# Altium PCB PCBA.PcbDoc
Units mil, origin at the board's own origin, x right, y up, seen from the top; angles counter-clockwise.
Board outline 2540 x 685 mil, 2 copper layers (Top Layer, Bottom Layer), stack 61.811 mil thick; 44 components, 30 nets, 131 pads, 33 vias.
Unrouted connection lines stored in the file: 2.
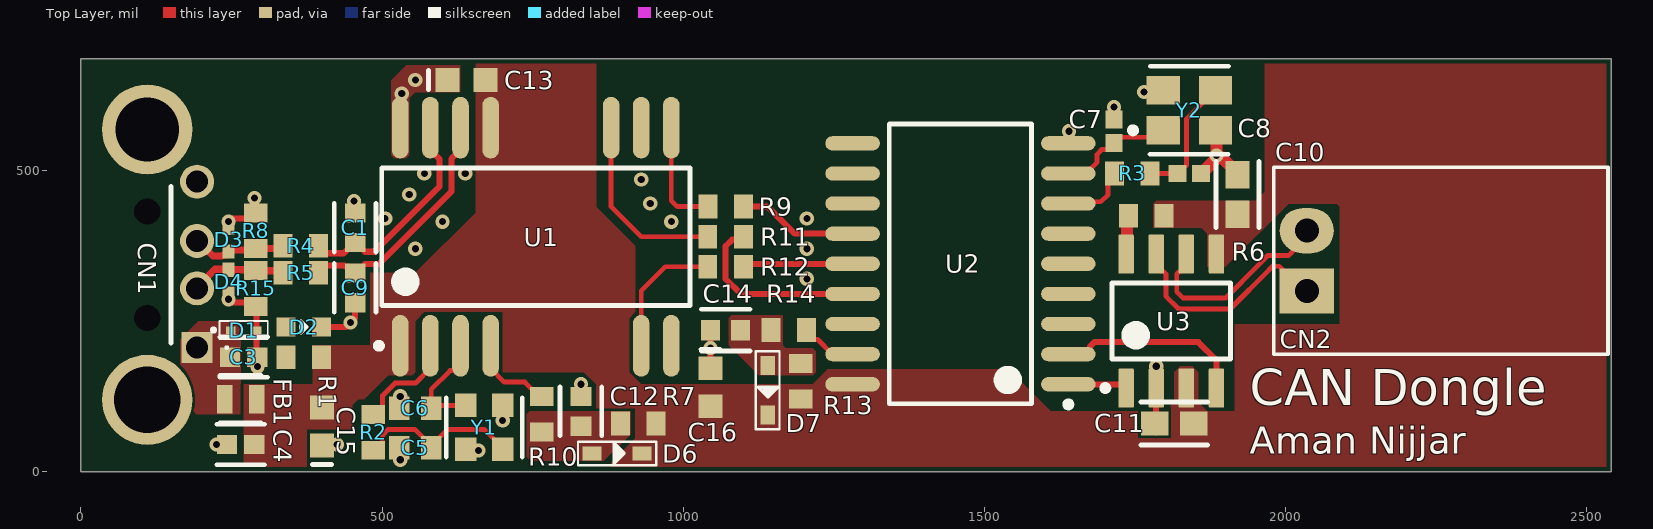
[diagram p0: Top Layer view]
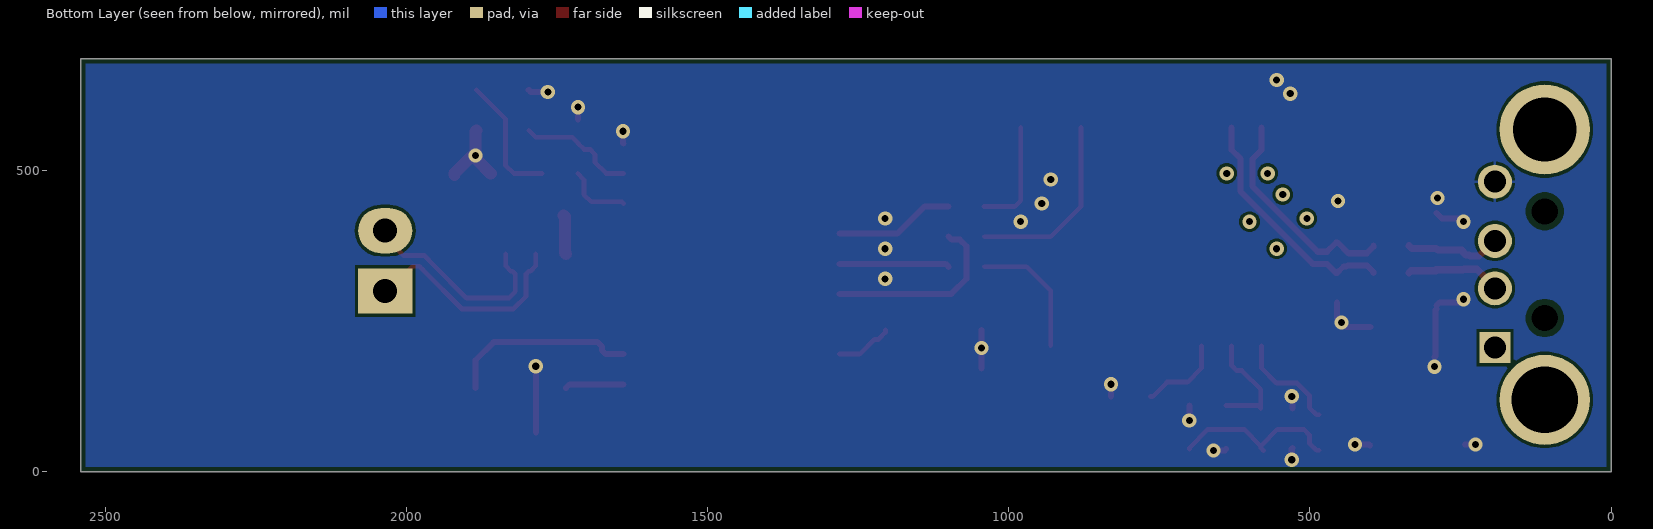
[diagram p1: Bottom Layer view, seen from below]
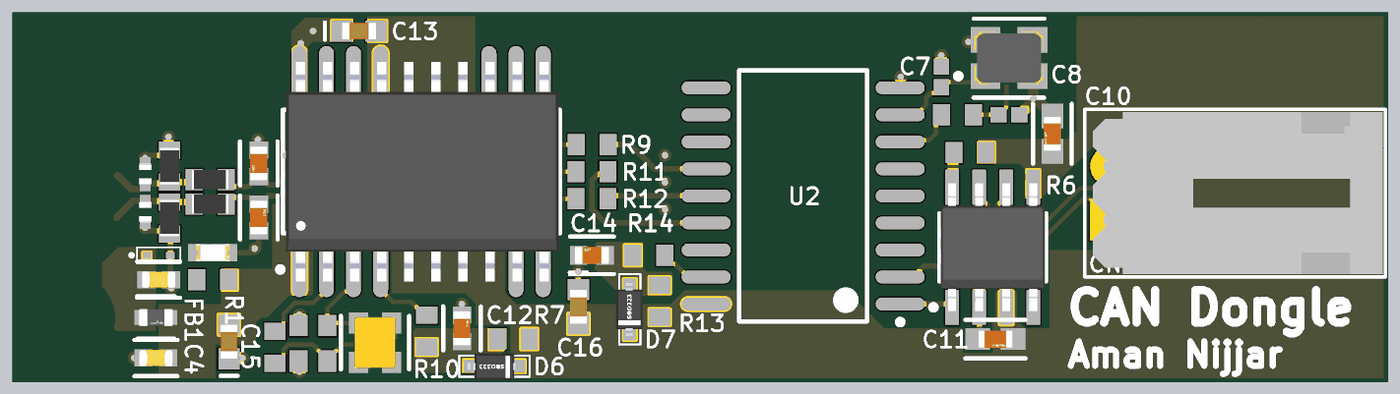
[diagram p2: 3D render of the assembled board from above, using the file's embedded part models]

## Layer stack, top to bottom
Top Solder: solder mask 0.5, Solder Resist, Dk 3.8
Top Layer: signal copper 1.378
Dielectric: core 59.055, FR-4, Dk 4.5
Bottom Layer: signal copper 1.378
Bottom Solder: solder mask 0.5, Solder Resist, Dk 3.8

## Board outline
0,0 2540,0 2540,685 0,685

## Design rules (kind name [scope] priority, off if disabled: settings)
BoardOutlineClearance [All] p1: gap=7.87 ignorepadtopadclearanceinfootprint=FALSE
Clearance [All] p1: gap=5 ignorepadtopadclearanceinfootprint=FALSE except(9.84: Arc-Hole Track-Hole SMDPad-Hole THPad-Hole Via-Hole Fill-Hole Poly-Hole Region-Hole Text-Hole)
ComponentClearance [All] p1: gap=5 collisioncheckmode=3 verticalgap=5 showdistances=TRUE
DiffPairsRouting [All] p1: maxlimit=10 minlimit=5 mostfreqgap=5 toplayer_minwidth=5 toplayer_maxwidth=1000 toplayer_prefwidth=12 bottomlayer_minwidth=5 bottomlayer_maxwidth=1000 bottomlayer_prefwidth=5 maxuncoupledlength=500
Height [All] p1: minheight=0 maxheight=71497.94 prefheight=500
HoleSize [All] p1: absolutevalues=TRUE maxlimit=248.03 minlimit=11.81 maxpercent=80.000 minpercent=20.000
HoleToHoleClearance [All] p1: gap=9.84 allowstackedmicrovias=FALSE
MinimumAnnularRing [All] p1: minimumring=3
MinimumSolderMaskSliver [All] p1: minsoldermaskwidth=0
PlaneClearance [All] p1: clearance=5
PlaneConnect PlaneConnectPowerPads [InPadClass('PowerPads')] p1: planeconnectstyle=Direct reliefexpansion=20 reliefentries=4 reliefconductorwidth=10 reliefairgap=10
PlaneConnect [All] p2: pad.planeconnectstyle=Relief pad.reliefexpansion=11.81 pad.reliefentries=4 pad.reliefconductorwidth=5 pad.reliefairgap=5 via.planeconnectstyle=Direct via.reliefexpansion=11.81 via.reliefentries=4 via.reliefconductorwidth=5 via.reliefairgap=5
PolygonConnect PolygonConnectPowerPads [All vs (InPadClass('PowerPads'))] p1: connectstyle=Direct reliefconductorwidth=10 reliefentries=4 polygonreliefangle="90 Angle" airgapwidth=10
PolygonConnect [All] p2: thpad.connectstyle=Relief thpad.reliefconductorwidth=5 thpad.reliefentries=4 thpad.polygonreliefangle="90 Angle" thpad.airgapwidth=5 smdpad.connectstyle=Relief smdpad.reliefconductorwidth=5 smdpad.reliefentries=4 smdpad.polygonreliefangle="90 Angle" smdpad.airgapwidth=5 via.connectstyle=Direct via.reliefconductorwidth=5 via.reliefentries=4 via.polygonreliefangle="90 Angle" via.airgapwidth=5
RoutingVias [All] p1: holewidth=11.81 width=23.62 viastyle="Through Hole" minholewidth=11.81 minwidth=23.62 maxholewidth=23.62 maxwidth=259.84
SilkToSilkClearance [All] p1: silktosilkclearance=0
SilkToSolderMaskClearance [IsPad] p1: minsilkscreentomaskgap=5 clearancetoexposedcopper=TRUE
SolderMaskExpansion [All] p1: expansion=2.95 istentingtop=FALSE
Width [All] p1: maxlimit=1000 minlimit=5 preferedwidth=5 minimp=50.000000 maximp=50.000000 favimp=50.000000
20 further rules are at their usual default settings.

## Classes and differential pairs
differential pair U3_CAN: +U3_CAN_P -U3_CAN_N
differential pair U1_USB: +U1_USB_P -U1_USB_N
differential pair USB: +USB_P -USB_N

## Components (designator, comment, footprint, x,y, rotation, side; value= is the part's Value field where it differs from the comment)
C1 "06031A470JAT2A" FP-0603-L_1_6_0_15-W_0_81-IPC_C 455,405 r270 top locked value=47pF
C3 "AC0603KRX7R9BB103" FP-AC0603-IPC_C 270,190 r0 top locked
C4 "AC0603KRX7R9BB103" FP-AC0603-IPC_C 265,45 r180 top locked
C5 "18pF" CAPC1608X92X38NL15T08 555,39.41 r0 top locked
C6 "18pF" CAPC1608X92X38NL15T08 555,105 r0 top locked
C7 "GRM1555C1H120GA01D" CAPC1005X55X25ML05T10 1715,565 r270 top locked
C8 "GRM1555C1H120GA01D" CAPC1005X55X25ML05T10 1840,495 r180 top locked
C9 "06031A470JAT2A" FP-0603-L_1_6_0_15-W_0_81-IPC_C 455,305 r90 top locked value=47pF
C10 "CL10B104JB8NNNC" FP-CL10-0_1-IPC_A 1920,460 r270 top locked
C11 "CL10B104JB8NNNC" FP-CL10-0_1-IPC_A 1815,80 r0 top locked
C12 "06031A470JAT2A" FP-0603-L_1_6_0_15-W_0_81-IPC_C 830,100 r90 top locked value=47pF
C13 "Placeholder_Capacitor_0603" "CAPC1608N(0603\")" 640,650 r0 top locked value=0F
C14 "06031A470JAT2A" FP-0603-L_1_6_0_15-W_0_81-IPC_C 1070,235 r180 top locked value=47pF
C15 "Placeholder_Capacitor_0603" "CAPC1608N(0603\")" 400,75 r90 top locked value=0F
C16 "Placeholder_Capacitor_0603" "CAPC1608N(0603\")" 1045,140 r270 top locked value=0F
CN1 "USB-A, Plug, TH" "USB-A, Plug, TH-Footprint-1" -227.32,340.79 r270 top locked
CN2 "1x2 Shrouded Right Angle" "2X1 Female Header" 2035,300 r180 top locked
D1 "D5V0F1U2S9-7" D5V0F1U2S9-7-Footprint-1 270,235 r0 top locked value=5E-13F
D2 "LT Q39G-Q1OO-25-1" FP-LB_Q39E-MFG 370,240 r180 top locked
D3 "ESD321DPYR" FP-DPY0002A-MFG 245,385 r90 top locked
D4 "ESD321DPYR" FP-DPY0002A-MFG 245,315.32 r270 top locked
D6 "CUS08F30,H3F" SC-76 890,30 r0 top locked
D7 "CUS08F30,H3F" SC-76 1140,135 r270 top locked
FB1 "BLM18PG330SN1D" FP-BLM18-0_15-t0_8-d1_2-MFG 265,120 r0 top locked
R1 "RC0603FR-0710KL" RESC1608X55X25ML10T15 370,190 r180 top locked
R2 "RC0603JR-070RL" RESC1608X55X25ML10T15 485,65 r90 top locked value=0mΩ
R3 "RC0603JR-070RL" RESC1608X55X25ML10T15 1745,495 r180 top locked value=0mΩ
R4 "RC0603FR-0733RL" RESC1608X55X25ML10T15 365,375 r0 top locked
R5 "RC0603FR-0733RL" RESC1608X55X25ML10T15 365,330 r0 top locked
R6 "RC0603FR-0710KL" RESC1608X55X25ML10T15 1768.12,425.01 r180 top locked
R7 "RC0603FR-0710KL" RESC1608X55X25ML10T15 925,80 r0 top locked
R8 "RC0603FR-0733RL" RESC1608X55X25ML10T15 290,400 r270 top locked
R9 "0Ω" RESC1608X55X25ML10T15 1070.47,440 r180 top locked
R10 "RC0603FR-0710KL" RESC1608X55X25ML10T15 765,95 r90 top locked
R11 "0Ω" RESC1608X55X25ML10T15 1070,390 r180 top locked
R12 "0Ω" RESC1608X55X25ML10T15 1070,340 r180 top locked
R13 "RC0603FR-0710KL" RESC1608X55X25ML10T15 1195,150 r270 top locked
R14 "RC0603FR-0710KL" RESC1608X55X25ML10T15 1175,235 r0 top locked
R15 "RC0603FR-0733RL" RESC1608X55X25ML10T15 290,304 r90 top locked
U1 "MCP2210T-I/SO" SOIC-SO20_M 755,390 r90 top locked
U2 "MCP2515T-I/SO" SOIC-SO18_N 1460,345 r180 top locked
U3 "CAN Transceiver" 8-SOIC 1810,250 r90 top locked
Y1 "12MHz" FP-8Z-MFG 669.49,73.58 r90 top locked
Y2 "16MHz" FP-AM-MFG 1840,600 r0 top locked

## Footprints (in the part's own frame and the unit in brackets; to place one, negate y for a bottom-side part, rotate by r counter-clockwise, add the part's x,y. Pads: shape width x height; smd on the part's side, far side on the other; paste and mask are expansions set on the pad)
"2X1 Female Header" [mil]
  rect 90x75 hole 40: 1(0,0)
  oval 90x75 hole 40: 2(0,-100)
  silkscreen extent -500,-205 55,105, body extent -495,-200 40,100, height 273
8-SOIC [mm] "SOIC, 8-Leads, Body 5x4mm, Pitch 1.27mm, IPC Low Density"
  rrect15% 1.65x0.65 smd: 1(-2.825,1.905) 2(-2.825,0.635) 3(-2.825,-0.635) 4(-2.825,-1.905) 5(2.825,-1.905) 6(2.825,-0.635) 7(2.825,0.635) 8(2.825,1.905)
  silkscreen extent -2.95,-2.5 1.6,2.9, body extent -3,-2.45 3,2.45, height 1.63
CAPC1005X55X25ML05T10 [mm] "Chip Capacitor, 2-Leads, Body 1.00x0.50mm, IPC Low Density"
  rect 0.76x0.72 smd: 1(-0.49,0) 2(0.49,0)
  body extent -0.53,-0.28 0.53,0.27, height 0.55
"CAPC1608N(0603\")" [mm] "Chip Capacitor, Body 1.6x0.8mm (0603\"), IPC Medium Density"
  rect 1x1 smd: 1(-0.8,0) 2(0.8,0)
  silkscreen extent -1.6,-0.4 -1.6,0.4, body extent -0.8,-0.4 0.8,0.4, height 0.9
CAPC1608X92X38NL15T08 [mm] "Chip Capacitor, 2-Leads, Body 1.60x0.80mm, IPC Medium Density"
  rect 0.85x1 smd: 1(-0.675,0) 2(0.675,0)
  body extent -0.88,-0.48 0.88,0.47, height 0.92
D5V0F1U2S9-7-Footprint-1 [mm]
  rect 0.4x0.32 smd: 1(-0.55,0) 2(0.55,0)
  silkscreen extent -1.3,-0.38 1.02,0.38
FP-8Z-MFG [mm]
  rect 1x0.9 smd paste+0 mask+0: 1(-0.925,-0.775) 2(0.925,-0.775) 3(0.925,0.775) 4(-0.925,0.775)
  silkscreen extent -1.25,-1.6 1.25,1.6, body extent -1.53,-1.33 1.52,1.33, height 0.25
FP-0603-L_1_6_0_15-W_0_81-IPC_C [mil]
  rect 31.75x34.18 smd paste+0 mask+0: 1(-24.64,0) 2(24.64,0)
  silkscreen extent -41,-35 41,35, body extent -44,-23 44,23, height 10
FP-AC0603-IPC_C [mil]
  rect 33.79x31.97 smd paste+0 mask+0: 1(-22.72,0) 2(22.72,0)
  silkscreen extent -40,-33 40,33, body extent -31,-16 31,16, height 35
FP-AM-MFG [mm]
  rect 1.4x1.2 smd paste+0 mask+0: 1(-1.1,-0.85) 2(1.1,-0.85) 3(1.1,0.85) 4(-1.1,0.85)
  silkscreen extent -2.5,-1.86 1.65,1.85, body extent -1.9,-1.55 1.9,1.55, height 0.25
FP-BLM18-0_15-t0_8-d1_2-MFG [mm]
  rect 0.65x1.2 smd paste-1000 mask-1000: 1(-0.675,0) 2(0.675,0)
  silkscreen extent -0.87,-1 0.87,1, body extent -1.1,-0.7 1.1,0.7, height 0.25
FP-CL10-0_1-IPC_A [mil]
  rect 45.6x39.85 smd paste+0 mask+0: 1(-32.56,0) 2(32.56,0)
  silkscreen extent -55,-36 55,36, body extent -75,-40 75,40, height 10
FP-DPY0002A-MFG [mm]
  rect 0.6x0.5 smd paste+0 mask+0: 1(-0.5,0) 2(0.5,0)
  body extent -0.9,-0.45 0.9,0.45, height 0.25
FP-LB_Q39E-MFG [mm]
  rect 0.8x0.8 smd paste+0 mask+0: 1(-0.75,0) 2(0.75,0)
  silkscreen extent -0.13,-0.25 0.13,0.25, body extent -0.8,-0.4 0.8,0.4, height 0.4
RESC1608X55X25ML10T15 [mm] "Chip Resistor, 2-Leads, Body 1.60x0.80mm, IPC Low Density"
  rect 0.8x1 smd: 1(-0.75,0) 2(0.75,0)
  body extent -0.85,-0.45 0.85,0.45, height 0.55
SC-76 [mm]
  rect 0.8x0.6 smd: A(-1.05,0) K(1.05,0)
  silkscreen extent -1.65,-0.5 1.65,0.5, body extent -1.25,-0.65 1.25,0.6, height 0.9
SOIC-SO18_N [mm] "SOIC, 18-Leads, Body 11.6x7.5mm, Pitch 1.27mm, IPC Medium Density"
  oval 2.3x0.6 smd: 1(-4.55,5.08) 2(-4.55,3.81) 3(-4.55,2.54) 4(-4.55,1.27) 5(-4.55,0) 6(-4.55,-1.27) 7(-4.55,-2.54) 8(-4.55,-3.81) 9(-4.55,-5.08) 10(4.55,-5.08) 11(4.55,-3.81) 12(4.55,-2.54) 13(4.55,-1.27) 14(4.55,0) 15(4.55,1.27) 16(4.55,2.54) 17(4.55,3.81) 18(4.55,5.08)
  silkscreen extent -4.67,-5.9 3,6.05, body extent -3.8,-5.87 3.8,5.87, height 2.65
SOIC-SO20_M [mm] "SOIC, 20-Leads, Body 12.8x7.5mm, Pitch 1.27mm, IPC Low Density"
  oval 2.6x0.7 smd: 1(-4.6,5.715) 2(-4.6,4.445) 3(-4.6,3.175) 4(-4.6,1.905) 9(-4.6,-4.445) 10(-4.6,-5.715) 11(4.6,-5.715) 12(4.6,-4.445) 13(4.6,-3.175) 17(4.6,1.905) 18(4.6,3.175) 19(4.6,4.445) 20(4.6,5.715)
  silkscreen extent -4.72,-6.5 2.9,6.74, body extent -5.16,-6.45 5.16,6.35, height 2.65
"USB-A, Plug, TH-Footprint-1" [mm]
  rect 1.3x1.3 hole 0.92: 1(3.429,10.668)
  round 1.431 hole 0.92: 2(0.929,10.668) 3(-1.071,10.668) 4(-3.571,10.668)
  round 3.8 hole 2.79: MH1(5.629,8.568)
  round 3.8 hole 2.69: MH2(-5.771,8.568)
  round 0.55 hole 1.1 unplated: MH3(2.179,8.568) MH4(-2.321,8.568)
  silkscreen extent -3.37,9.57 3.48,11.97, body extent -6.35,-9.15 6.35,10.88, height 4.28

## Part data
C1 C9 C12 C14: library part CMP-00198-1, "47pF ± 5%, 100V, 0603 C0G/NP0", Case Code (Imperial)=0603, Case Code (Metric)=1608, Dielectric=C0G, Dielectric Material=Ceramic, Max Operating Temperature=125°C, Min Operating Temperature=-55°C, Package Quantity=1, Temperature Coefficient=30ppm/°C, Tolerance=5%, Voltage=100V, Case/Package=0603, Construction=Flat, Depth=0.81mm, Height=0.86mm, Lead Free="Lead Free", Length=1.6mm, Mounting Technology="Surface Mount", Packaging="Tape and Reel", Pins=2, Radiation Hardening=No, Reach SVHC Compliant=No, RoHS Compliant=Yes, Series=-, Termination=SMD/SMT, Thickness=0.035inch, Voltage Rating=100V, Width=0.032inch
C3: library part CMP-00152-2, "AC Series 0603 10 nF 50 V 10% X7R Multilayer Ceramic Capacitor", Capacitance=10nF, Case Code (Imperial)=0603, Case Code (Metric)=1608, Max Operating Temperature=125°C, Min Operating Temperature=-55°C, Ratings=AEC-Q200, Tolerance=10%, Voltage Rating=50V, Case/Package=0603, Lead Free="Lead Free", Mount="Surface Mount", Packaging="Cut Tape", RoHS Compliant=Yes
C4: library part CMP-00152-2, "AC Series 0603 10 nF 50 V 10% X7R Multilayer Ceramic Capacitor", Capacitance=100nF, Case Code (Imperial)=0603, Case Code (Metric)=1608, Max Operating Temperature=125°C, Min Operating Temperature=-55°C, Ratings=AEC-Q200, Tolerance=10%, Voltage Rating=50V, Case/Package=0603, Lead Free="Lead Free", Mount="Surface Mount", Packaging="Cut Tape", RoHS Compliant=Yes
C5 C6: library part CMP-2006-01495-1, Manufacturer=Vitramon, Part Number=VJ0603D180JXPAJ
C7 C8: library part CMP-00106-1, "MURATA - GRM1555C1H120GA01D - SMD flerskiktig keramisk kondensator, 12 pF, 50 V, 0402 [1005 Metrisk], ± 2%, C0G / NP0, GRM Series", Capacitance=12pF, Case Code (Imperial)=0402, Case Code (Metric)=1005, Dielectric=C0G, Max Operating Temperature=125°C, Min Operating Temperature=-55°C, Package Quantity=10000, Tolerance=2%, Voltage=50V, Case/Package=0402, Depth=0.5mm, Height=0.5mm, Lead Free="Lead Free", Length=1mm, Material=Ceramic, Mount="Surface Mount", Packaging="Tape and Reel", Radiation Hardening=No, REACH SVHC="No SVHC", Termination=SMD/SMT, Thickness=0.022inch, Voltage Rating=50V, Voltage Rating (DC)=50V, Width=0.5mm
C10 C11: library part CMP-00000-4, "CAP CER 0.1UF 50V X7R 0603", Capacitance=100nF, Case Code (Imperial)=0603, Case Code (Metric)=1608, Dielectric=X7R, Max Operating Temperature=125°C, Min Operating Temperature=-55°C, Package Quantity=1, Tolerance=5%, Voltage=50V, Case/Package=0603, Contact Plating=Tin, Depth=0.8mm, Height=0.8mm, Length=1.6mm, Material=Ceramic, Mount="Surface Mount", Packaging="Tape and Reel", Radiation Hardening=No, Thickness=0.035inch, Voltage Rating=50V, Width=0.031inch
C13 C15 C16: library part CMP-006-0054-1, "Placeholder 0603 SMT Footprint", Component Type="Standard (No BOM)", Date Created=2016-06-26, Design Item ID=Placeholder_Capacitor_0603, Made By="Ashwin Sira", PackageDescription="Chip Capacitor", Pin Count=2, Publisher=AUVic, Source=AUVic_Schematic_Library_Capacitors.SchLib
CN1: library part CMP-00208-4, Color=Black, Current Rating=1.5A, Flammability Rating="UL94 V-0", Insulation Resistance=1GR, Max Operating Temperature=85°C, Max Voltage Rating (AC)=150V, Min Operating Temperature=-20°C, Package Quantity=1000, Connector Type=USB, Contact Material=Brass, Contact Plating=Gold, Depth=18.8mm, Gender=Male, Halogen Free="Low Halogen", Housing Color=Black, Housing Material=Thermoplastic, Lead Free="Lead Free", Length=12.7mm, Mounting Technology="Through Hole", Number of Circuits=4, Number of Contacts=4, Number of Ports=1, Number of Positions=4, Orientation="Right Angle", Packaging=Tray, Reach SVHC Compliant=Unknown, Series=48037, Termination="Through Hole", Voltage Rating=150V, Voltage Rating (AC)=150V, Weight=0.08113oz
CN2: library part CMP-00010-3, "02 MTE HDR SRRA LATCH", Color=Black, Contact Current Rating=3A, Contact Resistance=15mR, Flammability Rating="UL94 V-0", Insulation Resistance=5GR, Max Operating Temperature=105°C, Min Operating Temperature=-65°C, Package Quantity=68, Approvals=CSA, Backwall/Post Interruptions="No (Without)", Connector Type=Plug,Header,Pin, Contact Gender=Male, Contact Material=Brass, Contact Mating Length=0.23inch, Contact Plating=Gold,Tin,Matte, Contact Retention="Yes (With)", Contact Shape=Square, Current Rating=3A, Depth=13.59mm, ELV=Compliant, Gender=Male, Height=13.59mm, Housing Color=Black, Housing Material=Thermoplastic, Lead Free="Lead Free", Length=7.62mm, Mating Alignment="Yes (With)", Mating Retention="Yes (With)", Mount="Through Hole", Number of Contacts=2, Number of Positions=2, Number of Rows=1, Orientation="Right Angle", Packaging=Rail/Tube, PCB Mount Alignment="No (Without)", PCB Mount Retention=Without, PCB Mounting Orientation="Right Angle", PCB Thickness=0.062inch, Pitch=2.54mm, REACH SVHC=Unknown, Row Spacing=0.1inch, Strain Relief="No (Without)", Tail Length=3.3mm, Termination=Crimp
D1: library part CMP-00206-1, "Diode TVS Dual Uni-Dir 5.5V 250000W 2-Pin SOD-923 T/R", Breakdown Voltage=6V, Case/Package=SOD-923-2, Clamping Voltage=10V, Max Operating Temperature=150°C, Max Power Dissipation=250mW, Max Reverse Leakage Current=100nA, Max Surge Current=1.5A, Min Operating Temperature=-65°C, Package Quantity=10000, Peak Pulse Power=250kW, Power Line Protection=Yes, Reverse Standoff Voltage=5.5V, Contact Plating=Tin,Matte, Diode Type=ZENER, Direction=Unidirectional, ESD Protection=Yes, Min Breakdown Voltage=6V, Mounting Technology="Surface Mount", Number of Unidirectional Channels=1, Packaging="Tape and Reel", Peak Pulse Current=1.5A, Polarity=Unidirectional, RoHS Compliant=Yes, Series=-, Termination=SMD/SMT, Working Voltage=5.5V
D2: library part CMP-00064-3, "LED GREEN DIFFUSED 0603 SMD", Case/Package=SMD/SMT, Color=Green, Forward Current=15mA, Forward Voltage=2.85V, Max Operating Temperature=85°C, Min Operating Temperature=-40°C, Reverse Voltage=5V, Test Current=5mA, Depth=0.9mm, Dominant Wavelength=530nm, Length=1.7mm, Lens Style=Diffused,Colorless,Rectangular, Luminous Flux=0.55lm, Luminous Intensity=280mcd, Mount="Surface Mount", Number of Elements=1, Number of LEDs=1, Number of Pins=2, Packaging="Tape and Reel", Radiation Hardening=No
D3 D4: library part CMP-00211-1, "ESD Suppressor Diode TVS Uni-Dir 3.6V 2-Pin X1SON T/R", RoHS Compliant=Yes
D6 D7: library part CMP-057-0000-2, "Diode Schottky 30V 800mA Surface Mount USC", Average Rectified Current=800mA, Case/Package=SOD, Max Operating Temperature=125°C, Max Repetitive Reverse Voltage (Vrrm)=30V, Min Operating Temperature=-55°C, Peak Non-Repetitive Surge Current=5A, Peak Reverse Current=50uA, Contact Plating=Tin,Silver, Element Configuration=Single, Max Reverse Voltage (DC)=30V, Mount="Surface Mount", Number of Pins=2, Packaging="Tape and Reel"
FB1: library part CMP-0686-00590-4, "Chip Ferrite Bead, 0603, 33Ω @ 100MHz, 0.025Ω, 25%, 3A", Case Code (Imperial)=0603, Case Code (Metric)=1608, Current Rating=3A, DC Resistance (DCR)=25mR, ESR (Equivalent Series Resistance)=33R, Manufacturer Series=BLM18P, Max Operating Temperature=125°C, Min Operating Temperature=-55°C, Package Quantity=1, Test Frequency=100MHz, Tolerance=25%, Case/Package=0603, Core Material=Ferrite, DC Current=3A, DC Resistance-Max=25mR, Depth=0.8mm, Height=0.8mm, Impedance=33R, Lead Free="Lead Free", Length=1.6mm, Material=Steel, Max Current Rating=3A, Max DC Current=3A, Number of Circuits=1, Number of Functions=1, Number of Lines=1, Number of Pins=2, Packaging="Tape and Reel", Radiation Hardening=No, REACH SVHC="No SVHC", Resistance=25mR, RoHS Compliant=Yes, Series=BLM18P, Shielding=Unshielded, Terminal Finish=Tin, Termination=SMD/SMT, Width=0.8mm
R1 R6 R7 R10 R13 R14: library part CMP-00037-3, "10kΩ ± 1%, 1/10W, ±100ppm 0603", Case Code (Imperial)=0603, Case Code (Metric)=1608, Max Operating Temperature=155°C, Min Operating Temperature=-55°C, Power Rating=100mW, Resistance=10kΩ, Temperature Coefficient=100ppm/°C, Tolerance=1%, Voltage Rating=75V, Voltage Rating (DC)=50V, Case/Package=0603, Composition="Thick Film", Depth=0.8mm, Height=0.45mm, Lead Free="Lead Free", Lead Pitch=0.3mm, Length=1.6mm, Military Standard=Not, Number of Pins=2, Packaging="Tape and Reel", REACH SVHC="No SVHC", Termination=SMD/SMT, Weight=7.1E-05oz, Width=0.8mm
R2 R3: library part CMP-00214-1, "RES SMD 0 OHM JUMPER 1/10W 0603", Case Code (Imperial)=0603, Case Code (Metric)=1608, Max Operating Temperature=155°C, Max Power Dissipation=100mW, Min Operating Temperature=-55°C, Package Quantity=5000, Resistance Tolerance=5%, Resistor Type="Thick Film", Temperature Coefficient=200ppm/°C, Tolerance=1%, Voltage Rating=50V, Case/Package=0603, Construction=Rectangular, Contact Plating=Tin,Matte, Depth=0.8mm, Features="Moisture Resistant", Height=0.45mm, Lead Free="Lead Free", Length=1.6mm, Military Standard=Not, Number of Terminations=2, Packaging="Tape and Reel", Pins=2, Power Rating=100mW, Reach SVHC Compliant=Unknown, RoHS Compliant=Yes, Series=RC, Technology="THICK FILM", Termination=SMD/SMT, Voltage Rating (DC)=50V, Width=0.8mm
R4 R5: library part CMP-00060-2, "Res Thick Film 0603 33 Ohm 1% 1/10W +/-100ppm/ßC Molded SMD Paper T/R", Case Code (Imperial)=0603, Case Code (Metric)=1608, Max Operating Temperature=155°C, Max Power Dissipation=100mW, Min Operating Temperature=-55°C, Package Quantity=1, Resistance=33Ω, Temperature Coefficient=100ppm/°C, Tolerance=1%, Voltage Rating=75V, Voltage Rating (DC)=50V, Case/Package=0603, Composition="Thick Film", Depth=0.8mm, Features="Moisture Resistant", Height=0.45mm, Lead Free="Lead Free", Lead Pitch=0.3mm, Length=1.6mm, Military Standard=Not, Number of Pins=2, Number of Terminations=2, Packaging="Tape and Reel", Power Rating=100mW, REACH SVHC="No SVHC", Termination=SMD/SMT, Weight=7.1E-05oz, Width=0.8mm
R8 R15: library part CMP-00060-2, "Res Thick Film 0603 33 Ohm 1% 1/10W +/-100ppm/ßC Molded SMD Paper T/R", Case Code (Imperial)=0603, Case Code (Metric)=1608, Max Operating Temperature=155°C, Max Power Dissipation=100mW, Min Operating Temperature=-55°C, Package Quantity=1, Resistance=15kΩ, Temperature Coefficient=100ppm/°C, Tolerance=1%, Voltage Rating=75V, Voltage Rating (DC)=50V, Case/Package=0603, Composition="Thick Film", Depth=0.8mm, Features="Moisture Resistant", Height=0.45mm, Lead Free="Lead Free", Lead Pitch=0.3mm, Length=1.6mm, Military Standard=Not, Number of Pins=2, Number of Terminations=2, Packaging="Tape and Reel", Power Rating=100mW, REACH SVHC="No SVHC", Termination=SMD/SMT, Weight=7.1E-05oz, Width=0.8mm
R9 R11 R12: library part CMP-2100-03667-1, "Chip Resistor, 0 Ohm, +/- 5%, 0.1 W, -55 to 155 degC, 0603 (1608 Metric), RoHS, Tape and Reel", Case Code (Imperial)=0603, Case Code (Metric)=1608, Manufacturer=Yageo, Max Operating Temperature=155degC, Min Operating Temperature=-55degC, Package Description="2-Pin Surface Mount Device, Body 1.6 x 0.8 mm", Package Quantity=5000, Power Rating=100mW, Resistance=0mOhm, Temperature Coefficient=200ppm/degreesC, Tolerance=5%, Voltage Rating=50V, Case/Package=0603, Composition=ThickFilm, Contact Plating=Tin, Datasheet URL=http://www.yageo.com/NewPortal/yageodocoutput?fileName=/pdf/R-Chip/PYu-RC_Group_51_RoHS_L_5.pdf, Datasheet Version="Rev. 5, 10/2016", Depth=0.8mm, Height=0.45mm, Lead Free=LeadFree, Length=1.6mm, Manufacturer URL=http://www.yageo.com/, Military Standard=Not, Number of Pins=2, Package Reference=0603, Packaging=TapeandReel, Radiation Hardening=No, REACH SVHC=NoSVHC, RoHSCompliant=true, Termination=SMD/SMT, Voltage Rating (DC)=50V, Width=0.8mm
U1: library part CMP-00209-1, "USB to SPI Protocol Converter 20 SOIC .300in T/R RoHS Compliant: Yes", Case/Package=SOIC, Max Operating Temperature=85°C, Min Operating Temperature=-40°C, Operating Supply Current=13mA, Operating Supply Voltage=5.5V, Package Quantity=1600, Data Rate=480Mbps, Interface=SPI, Packaging="Tape and Reel", Radiation Hardening=No, RoHS Compliant=Yes
U2: library part CMP-0186-00139-2, "Stand-Alone CAN Controller With SPI Interface, 18-Pin SOIC, Industrial Temperature, Tape and Reel", Code_JEDEC=MS-013, ComponentLink1Description="Manufacturer URL", ComponentLink1URL=http://www.microchip.com/, ComponentLink2Description=Datasheet, ComponentLink2URL=http://ww1.microchip.com/downloads/en/DeviceDoc/21801f.pdf, ComponentLink3Description="Package Specification", ComponentLink3URL=http://www.microchip.com/stellent/groups/techpub_sg/documents/packagingspec/en012702.pdf, DatasheetVersion="revF, Oct-2010", PackageDescription="18-Lead Plastic Small Outline (SO) - Wide 7.50mm Body [SOIC]", PackageReference=SOIC-SO18, PackageVersion="revBB, Aug-2009", RevisionNote="URLs added. DatasheetVersion updated."
U3: library part CMP-032-0000-3, "1/1 Transceiver Half CANbus 8-SO", Case/Package=SO, Max Operating Temperature=150°C, Max Supply Current=70mA, Max Supply Voltage=5.5V, Min Operating Temperature=-40°C, Min Supply Voltage=4.5V, Package Quantity=2500, Contact Plating=Gold, Data Rate=1Mbps, Interface=CAN, Lead Free="Lead Free", Mount="Surface Mount", Nominal Supply Current=70mA, Number of Pins=8, Number of Transceivers=1, Packaging="Tape and Reel", Propagation Delay=250ns, Radiation Hardening=No, Turn-On Delay Time=250ns
Y1: library part CMP-043-0009-1, "Crystal 12MHz ±30ppm (Tol) ±30ppm (Stability) 18pF FUND 150Ohm 4-Pin SMD T/R", Case/Package=SMD/SMT, ESR (Equivalent Series Resistance)=150R, Frequency Stability=30ppm, Load Capacitance=18pF, Max Operating Temperature=70°C, Min Operating Temperature=-20°C, Package Quantity=1, Depth=2mm, Frequency=12MHz, Frequency Tolerance=30ppm, Height=0.022inch, Length=2.5mm, Mount="Surface Mount", Number of Pins=4, Packaging="Tape and Reel", REACH SVHC="No SVHC", Termination=SMD/SMT, Tolerance=30ppm, Width=0.079inch
Y2: library part CMP-00105-1, "Crystals 16.000MHz 30ppm 12pF -40C to 85C", Case/Package=SMD/SMT, ESR (Equivalent Series Resistance)=100R, Frequency Stability=50ppm, Frequency Tolerance=30ppm, Load Capacitance=12pF, Max Operating Temperature=85°C, Min Operating Temperature=-40°C, Package Quantity=3000, Ratings=AEC-Q200, Frequency=16MHz, Height=0.028inch, Length=0.126inch, Mount="Surface Mount", Number of Pins=4, Packaging="Tape and Reel", REACH SVHC="No SVHC", Termination=SMD/SMT, Tolerance=30ppm, Width=2.5mm

## Via types
v1: diameter 23.62, hole 11.81, Top Layer to Bottom Layer, tented both sides, 33 vias

## Nets (pads, with @x,y where several pads share a name; then routed paths per layer and width w, separated by ;. In a path a pad name is that pad's centre, name@x,y a point inside that pad or via, vN(x,y) a via of type N, cw(c..) or ccw(c..) an arc to the next point about the centre after c; other vN are vias at no path point)
5V: C4.1 C10.2 C11.2 C13.2 C15.2 C16.2 D6.K D7.K FB1.2 R1.1 R6.1 R7.2 R13.2 U1.1 U1.17 U2.18 U3.3 U3.5
5V-RAW: C3.1 CN1.1 D1.1 FB1.1
GND: C1.1 C3.2 C4.2 C5.1 C6.1 C7.1 C8.1 C9.1 C10.1 C11.1 C12.2 C13.1 C14.2 C15.1 C16.1 CN1.4 D1.2 D2.1 D3.2 D4.2 R8.1 R15.1 U1.20 U2.9 U3.2 Y1.2 Y1.4 Y2.2 Y2.4 | length 796.9
  Top Layer w10: v1(225,45) C4.2 ; v1@245,280.47 285,280.47 R15.1@290,275.47 ; v1@245,420 280.47,420 R8.1 ; R15.1@290,270 291.65,268.35 D1.2 291.65,191.06 C3.2 ; D2.1 440,240 455,255 C9.1 ; C15.1 401.5,45 v1(425,45) ; C5.1 530,37.83 v1(530,19.68) ; C6.1 528.43,123.43 v1(530,125) ; Y1.4 641.14,35 v1(660,35) ; v1(700,85) Y1.2 ; C12.2 v1(830,145) ; C16.1 v1(1045,205) 1045,234.64 C14.2 ; U2.9 1640,545.87 v1(1640,565) ; C7.1 v1(1715,605) ; v1(1765,630) 1793.23,630 Y2.4 ; C11.1@1784.49,65 1785,65.52 U3.2 v1(1785,175)
  Top Layer w20: C8.1 1860.08,495 1882.39,517.31 1882.39,522.39 v1(1885,525) ; Y2.2 1885,564.84 v1(1885,525) ; C10.1 1920,495.43 1893.04,522.39 1887.61,522.39 v1(1885,525)
  other v1: 293.24,174.2 447.5,247.5 245,286.1 1205,320 1205,370 245,415 980,415 1205,420 945,445 453.24,449.2 288.24,454.2 930,485 532.55,627.48 555,650
NetC5_2: C5.2 R2.1 Y1.1 | length 284.5
  Top Layer w8: R2.1 488.94,35.47 500.69,47.22 500.69,60.81 509.87,70 553.94,70 C5.2@581.57,42.36 ; C5.2@576.9,34.74 C5.2 C5.2@581.57,42.36 ; Y1.1 700,39.13 669.13,70 609.21,70 C5.2@581.57,42.36
NetC8_2: C8.2 R3.1 Y2.3 | length 211
  Top Layer w8: R3.1 1821.5,495 1835.33,508.83 1835.33,585.49 Y2.3
NetC12_1: C12.1 D6.A R7.1 R10.1
NetC14_1: C14.1 D7.A R13.1 R14.1
NetCN1_MH1: CN1.MH1 CN1.MH2
NetD2_2: D2.2 R1.2
NetR6_2: R6.2 U3.8 | length 65.3
  Top Layer w20: U3.8 1736.8,363.02 1736.8,423.21 R6.2
NetR9_2: R9.2 U1.11 | length 186.2
  Top Layer w8: U1.11 980,450 990,440 R9.2
NetR11_2: R11.2 U1.13 | length 312.3
  Top Layer w8: U1.13 880,440 930,390 R11.2
NetR12_2: R12.2 U1.9 | length 218.1
  Top Layer w8: U1.9 930,300 970,340 R12.2
U1_MISO: R11.1 U2.15 | length 311.5
  Top Layer w10: R11.1 1094.53,385 1080.86,385 1070,374.14 1070,319.95 1094.95,295 U2.15
U1_MOSI: R12.1 U2.14 | length 183.4
  Top Layer w10: R12.1 1104.53,345 U2.14
U1_OSC1: R2.2 U1.2 | length 176.1
  Top Layer w8: R2.2 488.94,94.53 500.69,106.28 500.69,126.41 521.36,147.08 555.58,147.08 580,171.5 U1.2
U1_OSC2: C6.2 U1.3 Y1.3 | length 188.3
  Top Layer w8: U1.3 630,176.79 620.96,167.75 612.64,167.75 581.57,136.69 C6.2 586.57,110 Y1.3
U1_RST: R10.2 U1.4 | length 141.9
  Top Layer w8: U1.4 680,171.5 702.78,148.72 736.87,148.72 761.06,124.53 R10.2
U1_SCK: R9.1 U2.13 | length 199.5
  Top Layer w10: R9.1 1140,440 1185,395 U2.13
U1_USB_N: C9.2 R5.2 U1.18 | length 400.5
  Top Layer w10: R5.2 394.53,331.75 405.28,342.5 437.05,342.5 439.04,340.52 444.12,340.52 C9.2 456.21,329.64 471.57,345 495.22,345 615,464.78 615,519.06 630,534.06 U1.18
U1_USB_P: C1.2 R4.2 U1.19 | length 369.4
  Top Layer w10: R4.2 394.53,373.25 405.28,362.5 435.93,362.5 453.79,380.36 C1.2 456.21,380.36 471.57,365 486.93,365 595,473.07 595,519.06 580,534.06 U1.19
U2_OSC1: C7.2 U2.8 Y2.1 | length 195.3
  Top Layer w8: U2.8 1668.37,495 1686.9,513.53 1686.9,526.9 1695,535 1704.83,535 1715,545.17 C7.2 1724.29,555 1785.16,555 Y2.1
U2_OSC2: R3.2 U2.7 | length 111.4
  Top Layer w8: U2.7 1642.12,447.99 1692.99,447.99 1705,460 1705,484.53 R3.2
U2_RST: R14.2 U2.17 | length 95.2
  Top Layer w8: R14.2 1204.53,231.06 1216.28,219.31 1223.09,219.31 1247.4,195 U2.17
U2_RX: U2.2 U3.4 | length 316.7
  Top Layer w10: U2.2 1668.91,195 1675.2,201.29 1675.2,207.97 1682.23,215 1855,215 1885,185 U3.4
U2_TX: U2.1 U3.1 | length 98.4
  Top Layer w10: U2.1 1728.78,145 U3.1
U3_CAN_N: CN2.2 U3.6 | length 344.2
  Top Layer w8: U3.6 1835,341.54 1826.2,332.74 1823.69,332.74 1819,328.05 1819,298.69 1829.69,288 1900,288 1955.31,343.31 1955.31,343.77 1970.54,359 2005.12,359 2009.81,363.69 2009.81,364.18 2035,389.37 CN2.2
U3_CAN_P: CN2.1 U3.7 | length 369.2
  Top Layer w8: U3.7 1785,341.54 1793.8,332.74 1796.31,332.74 1801,328.05 1801,291.23 1822.23,270 1907.46,270 1973.31,335.86 1973.31,336.31 1978,341 1989.31,341 1994,336.31 1994,333.5 2027.5,300 CN2.1
USB_N: CN1.2 D4.1 R5.1 R15.2 | length 158.4
  Top Layer w12: CN1.2 192.68,305.94 222.54,335.81 D4.1@245,335.81 ; D4.1 R15.2@290,335 ; R15.2 331.94,333.53 R5.1
USB_P: CN1.3 D3.1 R4.1 R8.2 | length 161.5
  Top Layer w12: CN1.3 194.17,382.95 219.32,357.81 234.13,357.81 235.82,359.5 241.16,359.5 245,363.35 D3.1 247.58,367.89 287.42,367.89 R8.2 330.94,370.47 R4.1
pads on no net: CN1.MH3 CN1.MH4 U1.10 U1.12 U2.3 U2.4 U2.5 U2.6 U2.10 U2.11 U2.12 U2.16
copper on no net:
  other v1: 555,370 600,415 505,420 545,460 570,495 638,495

## Polygon pours and split planes (outlines as drawn)
5V on Top Layer "Top Layer-5V" (solid, pour order 47): 270,0 375,0 375,70 450,70 450,110 460,120 470,120 510,160 550,160 555,165 555,250 570,265 700,265 700,165 835,165 855,145 855,105 920,105 920,55 880,15 880,0 2540,0 2540,685 1965,685 1965,465 1950,450 1785,450 1780,445 1780,405 1860,405 1870,395 1870,340 1900,340 2005,445 2085,445 2090,440 2090,245 1915,245 1915,100 1870,100 1855,115 1855,165 1845,175 1825,175 1815,165 1815,115 1800,100 1610,100 1540,170 1240,170 1215,145 930,145 910,165 910,255 920,265 920,375 855,440 855,685 655,685 655,430 555,330 480,330 480,210 385,210 385,145 270,145
GND on Top Layer "GND_L01_P025" (solid, pour order 25): 630,675 630,630 555,630 545,620 545,525 540,520 520,520 515,525 515,530 515,650 540,675
NetC14_1 on Top Layer "NETC14_1_L01_P036" (solid, pour order 36): 1080,260 1165,260 1165,210 1170,205 1215,205 1220,200 1220,165 1215,160 1125,160 1075,210 1075,255
5V-RAW on Top Layer "5V-RAW_L01_P027" (solid, pour order 27): 265,250 195,250 165,220 165,190 165,95 225,95 265,95
NetC12_1 on Top Layer "NETC12_1_L01_P026" (solid, pour order 26): 740,95 745,100 912.25,100 912.25,62.25 867.64,17.64 747.36,17.64 740,25
GND on Bottom Layer "GND_L02_P043" (solid, pour order 43): 0,0 2540,0 2540,685 0,685

## Silkscreen, mask and mechanical layers (free items; w line width, h text height)
Top Overlay:
  text "CAN Dongle" at 1940,109.99 h60
  text "Aman Nijjar" at 1940,30 h45
Mechanical 1:
  lines w20: 5,0 2540,0 2540,685 5,685 5,0